# EAGLE board Esp8266_HeatController2ch_Tg1612_v1.0 (EAGLE 9.7.0)
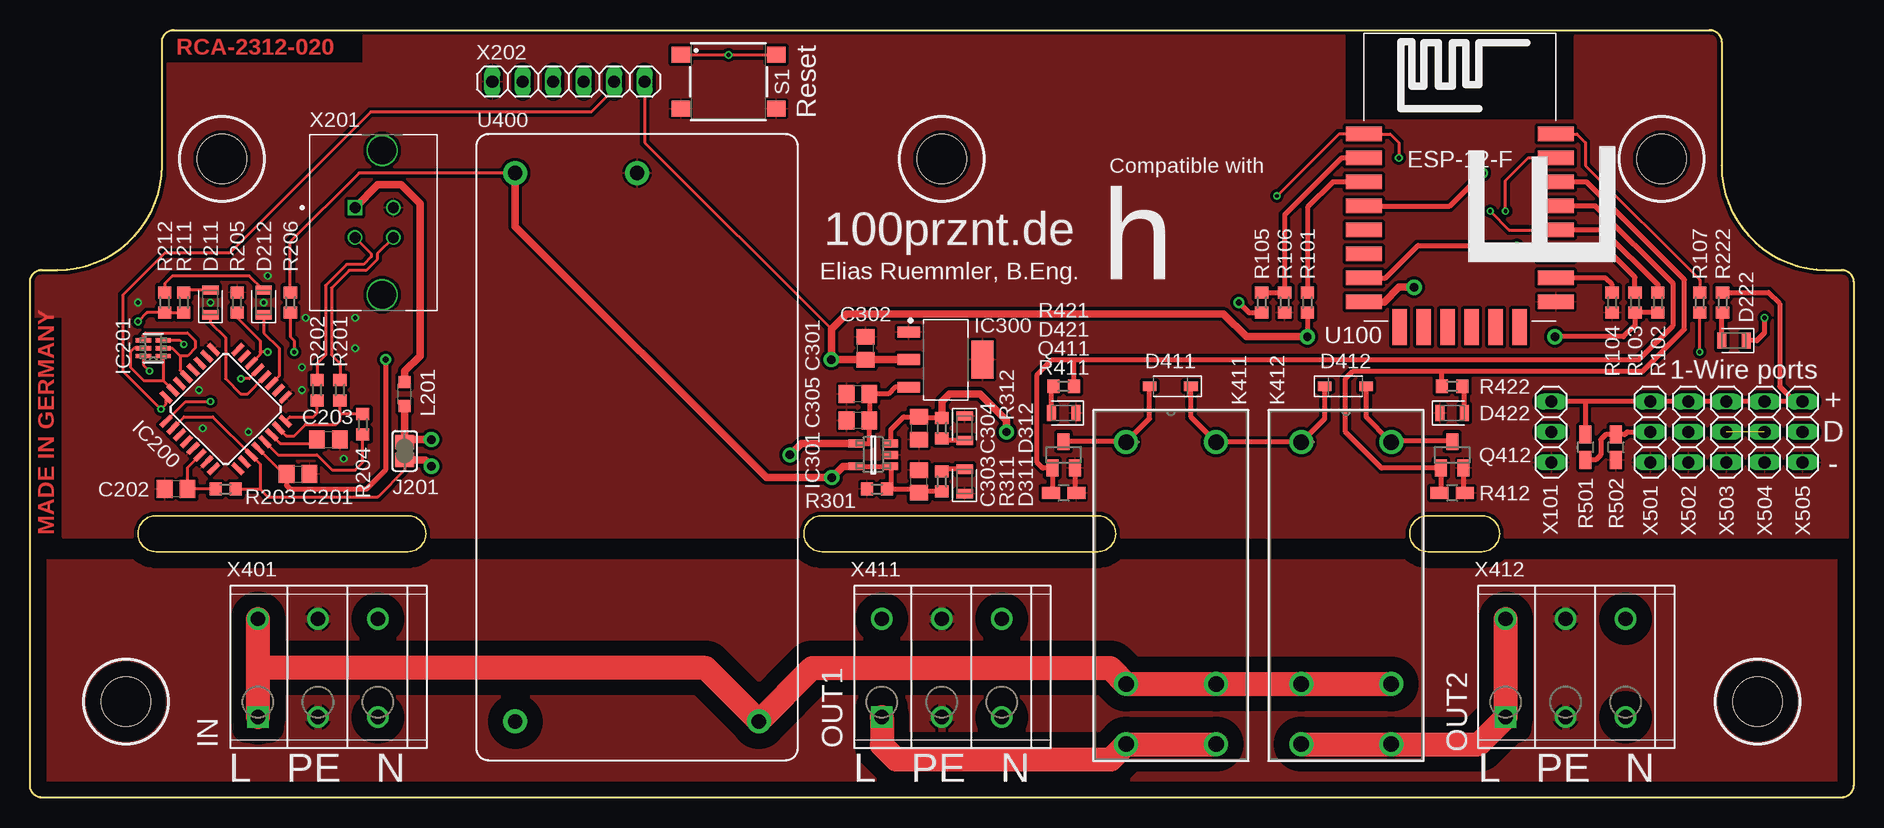
[diagram p0: board, top side]
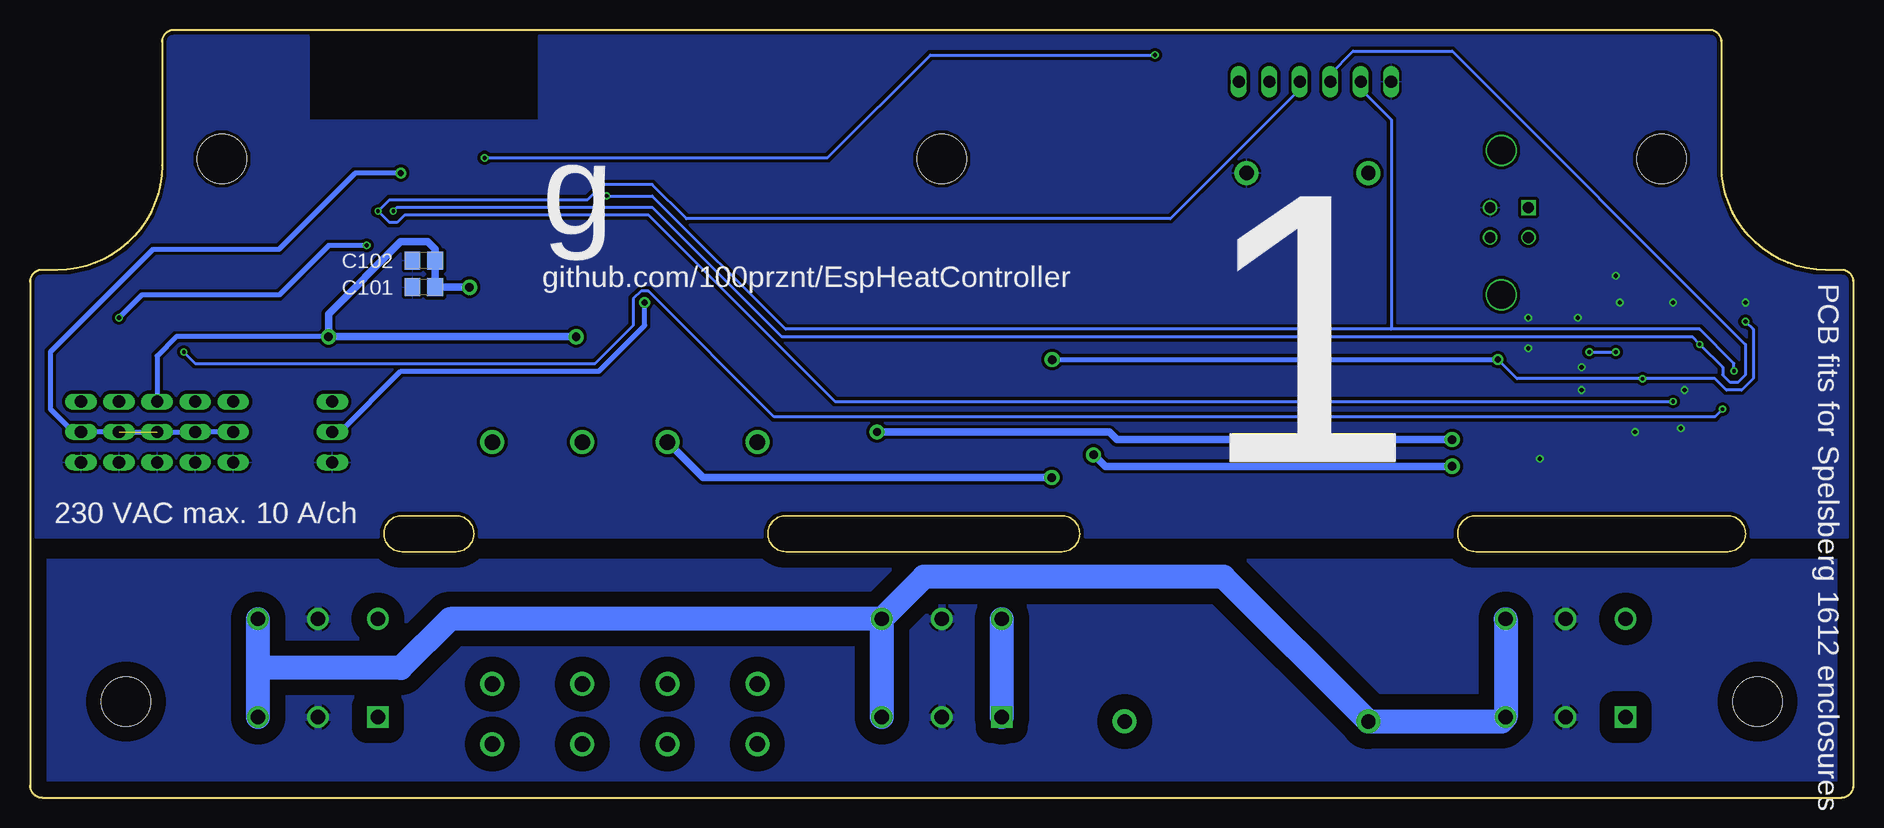
[diagram p1: board, bottom side, seen from below]

Size 152 x 64 mm. Coordinates in mm from the lower left corner, seen from the top.
Outline: 152,43 152,1 arc-90 151,0 1,0 arc-90 0,1 0,43 arc-90 1,44 2.3,44 arc90 11,52.7 11,63 arc-90 12,64 140,64 arc-90 141,63 141,52.7 arc90 149.7,44 151,44 arc-90 152,43
Outline: 66,20.5 89,20.5 arc90 90.5,22 arc90 89,23.5 66,23.5 arc90 64.5,22 arc90 66,20.5
Outline: 116.5,20.5 121,20.5 arc90 122.5,22 arc90 121,23.5 116.5,23.5 arc90 115,22 arc90 116.5,20.5
Outline: 10.5,20.5 31.5,20.5 arc90 33,22 arc90 31.5,23.5 10.5,23.5 arc90 9,22 arc90 10.5,20.5
Copper layers (1*16): Top / Bottom
Stack-up Default Layer Stack: Top User Defined 0.035mm / Dielectric-1 User Defined 1.6mm / Bottom User Defined 0.035mm
Design rules: minimum copper width class=1 10mil, minimum copper width class=0 10mil, minimum copper width 5mil, minimum drill size 0.3mm, copper clearance class=1 to class=1 10mil, copper clearance class=0 to class=0 10mil, copper clearance wire_polygon to wire_polygon 5mil, copper clearance wire_polygon to pad_smd 5mil, copper clearance wire_polygon to via 5mil, copper clearance pad_smd to pad_smd 5mil, copper clearance pad_smd to via 5mil, copper clearance via to via 5mil, copper clearance smd to pad (same net) 5mil, copper clearance smd to via (same net) 5mil, copper clearance smd to smd (same net) 5mil, dimension clearance 0.3mm, restrict clearance 0mil, drill distance 0.2mm, keepout clearance 0mil
Net classes: 0 default: width 0.254 mm, clearance 0.254 mm; 1 usb: width 0.254 mm, clearance 0.254 mm
Holes 4.1 mm at 8,8 144,8 16,53.25 76,53.25 136,53.25
RestrictTop: area 109.7,56.5 to 128.7,64.8; area 0.1,21.6 to 2.7,40; area 11.2,61.3 to 27.7,63.8
RestrictBottom: area 109.7,56.5 to 128.7,64.8

## Footprints (pad centres in the part's own frame; a part is rotated, then mirrored left to right if it is on the bottom)
C0805 = smd 1.3 x 1.5: 1 -0.95,0; 2 0.95,0
LEDC2012X110N_FLAT-B = smd 0.762 x 1.362: A 1.025,0; C -1.025,0
SOD3715X135 = smd 1.127 x 0.784: 1 -1.722,0; 2 1.722,0
LQFP32-7X7 = smd 1.2 x 0.4: 1 -4.225,2.8; 2 -4.225,2; 3 -4.225,1.2; 4 -4.225,0.4; 5 -4.225,-0.4; 6 -4.225,-1.2; 7 -4.225,-2; 8 -4.225,-2.8; 17 4.225,-2.8; 18 4.225,-2; 19 4.225,-1.2; 20 4.225,-0.4; 21 4.225,0.4; 22 4.225,1.2; 23 4.225,2; 24 4.225,2.8 | smd 0.4 x 1.2: 9 -2.8,-4.225; 10 -2,-4.225; 11 -1.2,-4.225; 12 -0.4,-4.225; 13 0.4,-4.225; 14 1.2,-4.225; 15 2,-4.225; 16 2.8,-4.225; 25 2.8,4.225; 26 2,4.225; 27 1.2,4.225; 28 0.4,4.225; 29 -0.4,4.225; 30 -1.2,4.225; 31 -2,4.225; 32 -2.8,4.225
SOT-363_ROM = smd 1.27 x 0.356: 1 -0.826,0.66; 2 -0.826,0; 3 -0.826,-0.66; 4 0.826,-0.66; 5 0.826,0; 6 0.826,0.66
SOT230P700X170-4 = smd 1.86 x 0.898: 1 -3.075,2.3; 2 -3.075,0; 3 -3.075,-2.3 | smd 1.86 x 3.189: 4 3.075,0
DBV0005A_M = smd 1.2 x 0.65: 1 -1.475,0.95; 2 -1.475,0; 3 -1.475,-0.95; 4 1.475,-0.95; 5 1.475,0.95
SJ = smd 1.168 x 1.6: 1 -0.762,0; 2 0.762,0
RELAY-SPST2_5MM = drill 1.295 pad 2.007: 1 -3.683,20.117; 2 -3.683,-0.051; 3 -3.683,-5.08; 4 3.81,-5.08; 5 3.81,-0.051; 6 3.81,20.117
L2012C = smd 1 x 1: 1 -1,0; 2 1,0
SOT23 = smd 1 x 1.4: 1 -0.95,-1.1; 2 0.95,-1.1; 3 0,1.1
R0603 = smd 1 x 1.1: 1 -0.85,0; 2 0.85,0
R0805W = smd 1.5 x 1: 1 -1.052,0; 2 1.052,0
430152050826 = smd 1.55 x 1.3: 1 -3.975,2.25; 2 -3.975,-2.25; 3 3.975,2.25; 4 3.975,-2.25
ESP12F-SMD = smd 3 x 1.2: ADC -8,3.8; EN -8,1.8; GND 8,-8.2; GPIO0 8,-2.2; GPIO2 8,-4.2; GPIO4 8,-0.2; GPIO5 8,1.8; GPIO12 -8,-4.2; GPIO13 -8,-6.2; GPIO14 -8,-2.2; GPIO15 8,-6.2; GPIO16 -8,-0.2; RST -8,5.8; RXD0 8,3.8; TXD0 8,5.8; VCC -8,-8.2 | smd 1.2 x 3: CS0 -5,-10.3; GPIO9 -1,-10.3; GPIO10 1,-10.3; MISO -3,-10.3; MOSI 3,-10.3; SCLK 5,-10.3
TMF10 = drill 1.2 pad 2: 1 -22.86,10.16; 2 -22.86,-10.16; 3 22.86,10.16; 4 22.86,0
1X03 = drill 1.016 long: 1 -2.54,0; 2 0,0; 3 2.54,0
M701-330442 = drill 0.914 square: 1 1.245,1.6 | drill 0.914: 2 -1.245,1.6; 3 -1.245,-1.6; 4 1.245,-1.6 | drill 2.311: SH1 -6.02,-0.66; SH2 6.02,-0.66
1X06 = drill 1.016 long: 1 -6.35,0; 2 -3.81,0; 3 -1.27,0; 4 1.27,0; 5 3.81,0; 6 6.35,0
SPT2,5/3-V-5,0 = drill 1.2 pad 1.8 square: 1A -5,-4.1 | drill 1.2 pad 1.8: 1B -5,4.1; 2A 0,-4.1; 2B 0,4.1; 3A 5,-4.1; 3B 5,4.1

## Placement (x,y rotation side)
C101  [C0805]  119.18,42.55 180 bottom
C102  [C0805]  119.18,44.77 180 bottom
C201  100n  [C0805]  22.34,26.99 0 top
C202  100n  [C0805]  12.18,25.72 180 top
C203  33n  [C0805]  24.88,29.84 0 top
C301  100n  [C0805]  69.02,33.66 180 top
C302  10u  [C0805]  69.65,37.47 90 top
C303  0u22  [C0805]  74.09,26.35 90 top
C304  0u22  [C0805]  74.09,30.8 270 top
C305  1u  [C0805]  69.02,31.43 180 top
D211  LED_BLUE  [LEDC2012X110N_FLAT-B]  15.04,41.27 90 top
D212  LED_BLUE  [LEDC2012X110N_FLAT-B]  19.48,41.27 90 top
D222  LED_BLUE  [LEDC2012X110N_FLAT-B]  142.04,38.1 180 top
D311  LED_BLUE  [LEDC2012X110N_FLAT-B]  77.91,26.35 90 top
D312  LED_BLUE  [LEDC2012X110N_FLAT-B]  77.91,30.8 270 top
D411  1N4148W  [SOD3715X135]  95.05,34.29 180 top
D412  1N4148W  [SOD3715X135]  109.66,34.29 0 top
D421  LED_BLUE  [LEDC2012X110N_FLAT-B]  86.16,32.07 180 top
D422  LED_BLUE  [LEDC2012X110N_FLAT-B]  118.55,32.07 0 top
IC200  FT232BL  [LQFP32-7X7]  16.31,32.38 135 top
IC201  UMH3N  [SOT-363_ROM]  10.28,37.47 180 top
IC300  LD1117S33TR  [SOT230P700X170-4]  76.32,36.51 0 top
IC301  TPS2104DBVRDBV0005A_M  [DBV0005A_M]  70.28,28.57 180 top
J201  [SJ]  31.23,28.89 270 top
K411  RZ03-1A4-D005  [RELAY-SPST2_5MM]  95.05,9.53 0 top
K412  RZ03-1A4-D005  [RELAY-SPST2_5MM]  109.66,9.53 0 top
L201  MI0805K400R-10  [L2012C]  31.23,33.66 90 top
Q411  BSS138  [SOT23]  86.16,28.57 0 top
Q412  BSS138  [SOT23]  118.55,28.57 0 top
R101  12k  [R0603]  106.48,41.27 270 top
R102  12k  [R0603]  135.69,41.27 270 top
R103  12k  [R0603]  133.78,41.27 270 top
R104  12k  [R0603]  131.88,41.27 270 top
R105  n/a  [R0603]  102.67,41.27 90 top
R106  n/a  [R0603]  104.58,41.27 90 top
R107  470  [R0603]  139.18,41.27 90 top
R201  27R  [R0603]  25.84,33.97 270 top
R202  27R  [R0603]  23.93,33.97 270 top
R203  470  [R0603]  16.31,25.72 0 top
R204  1K5  [R0603]  27.74,31.11 270 top
R205  10K  [R0603]  17.26,41.27 270 top
R206  1K5  [R0603]  21.71,41.27 270 top
R211  220  [R0603]  12.82,41.27 270 top
R212  220  [R0603]  11.23,41.27 270 top
R222  220  [R0603]  141.09,41.27 90 top
R301  10k  [R0603]  70.6,25.72 0 top
R311  500R  [R0603]  76,26.35 270 top
R312  500R  [R0603]  76,30.8 90 top
R411  47K  [R0805W]  86.16,25.4 180 top
R412  47K  [R0805W]  118.55,25.4 180 top
R421  220  [R0603]  86.16,34.29 0 top
R422  220  [R0603]  118.55,34.29 180 top
R501  4K7  [R0805W]  129.66,29.21 90 top
R502  n/a  [R0805W]  132.2,29.21 90 top
S1  430152050826  [430152050826]  58.22,59.69 0 top
U100  ESP8266MOD  [ESP12F-SMD]  119.18,49.53 0 top
U400  TMF 10105  [TMF10]  50.6,29.21 90 top
X101  [1X03]  126.8,30.48 90 top
X201  M701-330442  [M701-330442]  28.69,47.94 90 top
X202  [1X06]  44.89,59.69 0 top
X401  SPT2,5/3-V-5,0  [SPT2,5/3-V-5,0]  24,10.79 0 top
X411  SPT2,5/3-V-5,0  [SPT2,5/3-V-5,0]  76,10.79 0 top
X412  SPT2,5/3-V-5,0  [SPT2,5/3-V-5,0]  128,10.79 0 top
X501  [1X03]  135.06,30.48 90 top
X502  [1X03]  138.23,30.48 90 top
X503  [1X03]  141.41,30.48 90 top
X504  [1X03]  144.58,30.48 90 top
X505  [1X03]  147.75,30.48 90 top

## Library data of the parts
C101 C102 C201-C203 C301-C305 = rcl; SPICEPREFIX: C
D211 D212 D222 D311 D312 D421 D422 = LED; CATEGORY: LED; COLOR: BLUE; DESCRIPTION: CHIP LED FLAT; SUB-CATEGORY: CHIP; TYPE: FLAT_TOP
D411 D412 = Diode; CATEGORY: Diode; DESCRIPTION: DIODE GEN PURP 100V 300MA SOD123; MANUFACTURER: Diodes Incorporated; SUB-CATEGORY: Rectifier
IC200 = FutureTechnologyDevicesInternational; MF: FARNELL; MPN: FT232BL/TR; OC_FARNELL: unknown; OC_NEWARK: 38K1551
IC201 = RohmSemiconductor; COPYRIGHT: Copyright (C) 2023 Ultra Librarian. All rights reserved.; MANUFACTURER_PART_NUMBER: UMH3NTN; MFR_NAME: ROHM Semiconductor
IC300 = IC_Power-Management; CATEGORY: IC_Linear; DESCRIPTION: Adjustable voltage regulator; MANUFACTURER: STMicroelectronics; MPN: Generic; SERIES: LM1117; SUB-CATEGORY: Voltage Regulator; TYPE: Linear
IC301 = TexasInstruments; COPYRIGHT: Copyright (C) 2023 Ultra Librarian. All rights reserved.; MANUFACTURER_PART_NUMBER: TPS2104DBVR; MFR_NAME: Texas Instruments; REFDES: RefDes; TYPE: TYPE
J201 = jumper
K411 K412 = Relays; BUILT_BY: EMA_UL_Team; CATEGORY: Power Relays; COPYRIGHT: Copyright (C) 2016 Accelerated Designs. All rights reserved; DESCRIPTION: RZ03-1A4-D012; MANUFACTURER_PART_NUMBER: 1-1415899-6; PART_STATUS: active; SERIES: SCHRACK Power PCB Relay RZ; VENDOR: TE Connectivity
L201 = rcl; SPICEPREFIX: L
Q411 Q412 = Transistor; CATEGORY: Transistor; SUB-CATEGORY: MOSFET; TYPE: N-Channel
R101-R107 R201-R206 R211 R212 R222 R301 R311 R312 R411 R412 R421 R422 R501 R502 = rcl; SPICEPREFIX: R
S1 = Wurth_Switch_WS-TASV; DATASHEET-URL: https://www.we-online.com/redexpert/spec/430152050826?ae; HEIGHT: 5mm; OPERATION-FORCE: 260g; PART-NUMBER: 430152050826; QTY: 1000
U100 = EspressifSystems
U400 = TracoPower
X101 X202 X501-X505 = pinhead
X201 = Connector_USB; CATEGORY: Connector; CONTACTS: 4; CURRENT_RATING: 1.5A; DESCRIPTION: CONN RCPT USB2.0 TYPEB 4POS VERT; GENDER: Receptacle; MANUFACTURER: Harwin; MOUNT_TYPE: Vertical; MPN: M701-330442; OPERATING_TEMP: -55°C to +85°C; PART_STATUS: Active; ROHS_COMPLIANT: RoHS Compliant; SERIES: -; SUB-CATEGORY: USB; TYPE: USB-B; VOLTAGE_RATING: 30VAC/DC
X401 X411 X412 = PhoenixContact; ARROW_PART_NUMBER: 1991105; ARROW_PRICE-STOCK: https://www.arrow.com/en/products/1991105/phoenix-contact?region=nac; DESCRIPTION: PCB terminal block, nominal current: 24 A, rated voltage (III/2): 400 V, nominal cross section: 2.5 mm?, Number of potentials: 3, Number of rows: 1, Number of positions per row: 3, product range: SPT 2,5/..-V, pitch: 5 mm, connection method: Push-in spring connection, mounting: Wave soldering, conductor/PCB connection direction: 90 ?, color: green, Pin layout: Linear double pinning, Solder pin [P]: 2.5 mm, type of packaging: packed in cardboard; HEIGHT: 14.4mm; MANUFACTURER_NAME: Phoenix Contact; MANUFACTURER_PART_NUMBER: 1991105; MOUSER_PART_NUMBER: 651-1991105; MOUSER_PRICE-STOCK: https://www.mouser.co.uk/ProductDetail/Phoenix-Contact/1991105?qs=HG6crFoccqodg51MDMYEiw%3D%3D

## Nets
+3V3: C101.1 C102.1 C201.1 C302.1 IC200.4 IC200.13 IC300.2 R101.2 R102.2 R103.2 R211.2 R212.2 R222.2 R501.2 U100.VCC X101.3 X202.6 X501.3 X502.3 X503.3 X504.3 X505.3
A0: R105.1 X101.2
AC_L: K411.2 K411.5 K412.2 K412.5 U400.2 X401.1A X401.1B
AC_N: U400.1 X401.3A X401.3B X411.3A X411.3B X412.3A X412.3B
AC_PE: X401.2A X401.2B X411.2A X411.2B X412.2A X412.2B
CH1: Q411.1 R411.2 R421.2 U100.GPIO4
CH2: Q412.1 R412.2 R422.2 U100.GPIO5
D_N [usb]: IC200.8 R202.2
D_P [usb]: IC200.7 R201.2 R204.1
DTR: IC200.21 IC201.2 IC201.4
EXTPWR: C303.1 D411.1 D412.1 IC301.1 IC301.5 K411.6 K412.1 R206.1 R301.2 R311.2 U400.3
GND: C101.2 C102.2 C201.2 C202.2 C203.2 C301.2 C302.2 C303.2 C304.2 C305.2 D311.C D312.C D421.C D422.C IC200.9 IC200.17 IC200.29 IC200.31 IC300.1 IC300.4 IC301.2 Q411.2 Q412.2 R104.2 R106.1 R205.1 R301.1 R411.1 R412.1 R502.1 S1.2 S1.4 U100.GND U400.4 X101.1 X201.4 X202.1 X501.1 X502.1 X503.1 X504.1 X505.1
IO0: IC201.3 R102.1 U100.GPIO0 X202.3
IO2: R103.1 U100.GPIO2
IO15: R104.1 U100.GPIO15
N$1: R105.2 R106.2 U100.ADC
N$2: R107.2 U100.TXD0
N$3: R101.1 U100.EN
N$4: D211.C IC200.12
N$5: C202.1 IC200.30 R203.1
N$6: D212.C IC200.11
N$7: D211.A R211.1
N$8: D212.A R212.1
N$9: C203.1 IC200.6
N$10: D312.A R312.1
N$11: D422.A R422.1
N$12: D412.2 K412.6 Q412.3
N$13: L201.2 X201.1
N$14: D411.2 K411.1 Q411.3
N$15: D311.A R311.1
N$16: D421.A R421.1
N$17: IC200.5 R204.2
N$18: IC200.14 R205.2 R206.2
N$19: D222.C U100.GPIO13
N$20: D222.A R222.1
N$23: K411.3 K411.4 X411.1A X411.1B
N$24: K412.3 K412.4 X412.1A X412.1B
OWD: R501.1 R502.2 U100.GPIO16 X501.2 X502.2 X503.2 X504.2 X505.2
RST: IC201.6 S1.1 S1.3 U100.RST X202.2
RTS: IC200.23 IC201.1 IC201.5
RX: IC200.25 U100.RXD0 X202.4
TX: IC200.24 R107.1 X202.5
USBD_N [usb]: R202.1 X201.2
USBD_P [usb]: R201.1 X201.3
USBPWR: C304.1 IC301.3 J201.1 L201.1 R312.2
VIN: C301.1 C305.1 IC200.3 IC200.26 IC300.3 IC301.4 J201.2 R203.2

## Tracks (layer width: path | path; a pad name or v marks a point on that pad's centre or on a via)
+3V3  (via drill 0.3, 0.35, 0.5, 0.7)
  Top 0.254: 13.03,40.64 R211.2 R212.2 9.75,40.42 v9.01,39.69 | IC200.13 18.28,34.92 v17.58,34.92 | X202.6 51.23,54.61 66.79,39.05 | IC200.4 21.14,26.99 C201.1
  Top 0.406: C302.1 | R101.2 v106.48,38.42 | R102.2 R103.2 133.78,39.37 132.83,38.42 v127.12,38.42 | C201.1 21.39,26.03 21.71,25.72 28.06,25.72 29.65,27.3 v29.65,36.51 | X505.3 147.12,33.02 | 147.12,33.02 X504.3 X503.3 X502.3 X501.3 129.66,33.02 | 129.66,33.02 R501.2 | 129.66,33.02 X101.3 | R222.2 144.9,42.12 145.85,41.17 145.85,34.29 147.12,33.02
  Top 0.61: IC300.2 C302.1 | C302.1 v66.8,36.52 v66.79,36.51 66.79,39.05 68.06,40.32 99.5,40.32 101.4,38.42 v106.48,38.42 | U100.VCC 112.88,41.33 114.1,42.55 v115.37,42.55
  Bottom 0.254: v29.65,36.51 28.06,34.92 v17.58,34.92 11.55,34.92 10.59,33.97 9.33,33.97 8.37,34.92 8.37,39.05 v9.01,39.69
  Bottom 0.406: v66.79,36.51 v29.65,36.51 | v127.12,38.42 139.82,38.42 141.41,36.83 X503.3
  Bottom 0.61: v115.37,42.55 C101.1 C102.1 118.23,45.72 118.86,46.35 121.09,46.35 127.12,40.32 v127.12,38.42 v106.48,38.42
A0  (via drill 0.5)
  Top 0.406: v100.77,41.27 101.61,40.42 R105.1
  Bottom 0.406: X101.2 126.16,30.48 121.09,35.56 104.58,35.56 100.77,39.37 v100.77,41.27
AC_L
  Top 2: 19,10.79 56.31,10.79 U400.2 65.2,10.79 90.05,10.79 K411.2 K411.5 K412.2 K412.5 | X401.1A 19,10.79 | 19,10.79 X401.1B
AC_N
  Bottom 2: X401.3B X401.3A 29.34,6.35 U400.1 52.5,18.41 77.48,18.41 X411.3B | X411.3A X411.3B | X411.3B 116.98,14.89 121.09,10.79 133,10.79 | 133,10.79 X412.3B | X412.3A 133,10.79
AC_PE
  pour Top (isolate 1.27): -1.47,19.68 153.47,19.68 153.47,-1.91 -1.47,-1.91
  pour Bottom (isolate 1.27): -5.92,19.68 154.74,19.68 154.74,-4.45 -5.92,-4.45
CH1
  Top 0.406: R411.2 85.21,25.5 Q411.1 84.4,27.48 83.94,27.94 83.94,35.24 85.21,36.51 87.01,36.51 | 87.01,36.51 134.1,36.51 136.96,39.37 136.96,42.86 130.49,49.33 U100.GPIO4 | R421.2 87.01,36.51
CH2
  Top 0.406: R412.2 117.59,25.5 Q412.1 112.66,27.48 109.66,30.48 109.66,34.92 110.29,35.56 117.69,35.56 | 117.69,35.56 134.42,35.56 137.91,39.05 137.91,43.18 129.76,51.33 U100.GPIO5 | R422.2 117.69,35.56
D_N
  Top 0.254: IC200.8 21.65,31.75 23.61,31.75 23.93,32.07 R202.2
D_P
  Top 0.254: IC200.7 21.36,30.16 22.02,30.16 22.98,31.11 25.52,31.11 25.84,31.43 25.84,31.96 | 25.84,31.96 R201.2 | R204.1 25.84,31.96
DTR
  Top 0.254: IC201.2 11.86,37.47 12.5,36.83 | 12.5,36.83 12.5,35.63 IC200.21 | IC201.4 9.45,38.54 9.64,38.73 13.13,38.73 13.77,38.1 13.77,37.47 13.13,36.83 12.5,36.83
EXTPWR  (via drill 0.7)
  Top 0.254: R206.1 21.71,46.35 27.42,52.07 U400.3
  Top 0.406: R311.2 74.19,25.5 C303.1 73.78,25.72 71.76,25.72 | R301.2 71.76,25.72 | 71.76,25.72 IC301.1 IC301.5 | D411.1 96.77,31.73 K411.6 K412.1 107.93,31.6 D412.1
  Top 0.61: U400.3 40.44,47.62 61.39,26.67 v66.84,26.67 67.79,27.62 IC301.5
  Bottom 0.61: K411.6 95.89,26.67 v66.84,26.67
GND  (via drill 0.35)
  Top 0.406: Q411.2 87.11,25.5 R411.1 | Q412.2 119.5,25.5 R412.1
  other vias: 14.09,33.97 18.22,30.48 14.41,30.8 9.01,41.27 19.8,43.5 22.66,35.88 22.66,33.97 27.1,37.47 27.1,40.01 22.98,40.01 19.48,41.27 15.04,41.27 26.15,28.26
  pour Top: -2.11,21.59 153.47,21.59 153.47,71.12 -2.11,71.12
  pour Bottom: -6.55,21.59 155.38,21.59 155.38,70.48 -6.55,70.48
IO0  (via drill 0.3)
  Top 0.254: IC201.3 12.48,38.12 v12.82,37.78 | v121.72,48.9 123.28,47.33 128.07,47.33
  Top 0.406: U100.GPIO0 128.07,47.33 131.12,47.33 135.69,42.76 R102.1
  Bottom 0.254: v121.72,48.9 121.4,49.21 100.13,49.21 89.34,38.42 13.45,38.42 v12.82,37.78 10.91,35.88 10.91,35.24 10.28,34.61 9.64,34.61 9.01,35.24 9.01,37.78 33.45,62.23 41.71,62.23 43.62,60.33 X202.3
IO2
  Top 0.406: U100.GPIO2 131.85,45.33 133.78,43.4 R103.1
IO15
  Top 0.406: U100.GPIO15 131.31,43.33 131.88,42.76 R104.1
N$1
  Top 0.406: U100.ADC 109.33,53.33 104.58,48.58 R106.2 R105.2
N$2
  Top 0.254: U100.TXD0 128.94,55.33 129.66,54.61 129.66,52.7 139.18,43.18 R107.2
N$3
  Top 0.406: U100.EN 108.6,51.33 106.48,49.21 R101.1
N$4
  Top 0.254: D211.C 15.04,39.62 16.31,38.34 16.31,34.92 17.58,33.66 18.15,33.66 IC200.12
N$5
  Top 0.254: IC200.30 13.13,27.51 C202.1 R203.1
N$6
  Top 0.254: D212.C 19.48,38.73 20.76,37.47 20.76,35.13 IC200.11
N$7
  Top 0.254: D211.A 12.99,42.3 R211.1
N$8
  Top 0.254: D212.A 18.29,43.5 11.86,43.5 11.23,42.86 R212.1
N$9
  Top 0.254: IC200.6 20.87,29.53 23.93,29.53 C203.1
N$10
  Top 0.406: D312.A 76,29.77 R312.1
N$11
  Top 0.406: D422.A 119.57,34.29 R422.1
N$12
  Top 0.406: K412.6 113.36,29.74 | 113.36,29.74 111.38,31.73 D412.2 | Q412.3 118.48,29.74 113.36,29.74
N$13
  Top 0.61: X201.1 29,51.09 30.94,51.09 32.5,49.53 32.5,36.83 31.23,35.56 L201.2
N$14
  Top 0.406: K411.1 91.41,29.68 | 91.41,29.68 93.33,31.6 D411.2 | 91.41,29.68 Q411.3
N$15
  Top 0.406: D311.A 76,27.38 R311.1
N$16
  Top 0.406: D421.A 85.14,34.29 R421.1
N$17
  Top 0.254: IC200.5 20.69,28.57 23.93,28.57 25.2,27.3 27.1,27.3 27.74,27.94 R204.2
N$18  (via drill 0.35)
  Top 0.254: R205.2 17.26,40.01 19.17,38.1 19.17,37.15 | 19.17,37.15 19.17,36.94 IC200.14 | R206.2 21.71,38.42 22.02,38.1 v22.02,37.15 | v19.8,37.15 19.17,37.15
  Bottom 0.254: v22.02,37.15 v19.8,37.15
N$19  (via drill 0.35)
  Top 0.406: U100.GPIO13 112.98,43.33 115.69,46.04 v123.94,46.04 | v144.58,40.01 144.58,38.73 143.94,38.1 D222.C
  Bottom 0.406: v123.94,46.04 127.12,46.04 131.25,41.91 142.68,41.91 v144.58,40.01
N$20
  Top 0.406: D222.A 141.01,40.35 R222.1
N$23
  Top 2: X411.1A 71,4.37 72.19,3.17 90.1,3.17 K411.3 K411.4
  Bottom 2: X411.1A X411.1B
N$24
  Top 2: K412.3 K412.4 120.75,4.45 X412.1A X412.1B
OWD  (via drill 0.5)  (1 unrouted)
  Top 0.406: U100.GPIO16 118.34,49.33 v121.09,52.07 | X501.2 133.15,30.48 132.93,30.26 R502.2 131.34,30.26 130.93,29.84 130.93,28.57 130.51,28.16 R501.1
  Bottom 0.406: v121.09,52.07 124.9,52.07 131.25,45.72 141.72,45.72 150.3,37.15 150.3,32.38 148.39,30.48 X505.2 X504.2 X502.2 X501.2
RST  (via drill 0.3, 0.35)
  Top 0.254: IC201.6 9.45,36.07 v9.96,35.56 | v103.94,50.16 109.1,55.33 U100.RST 113.38,55.33 114.1,54.61 v114.1,53.34 | S1.1 54.27,61.91 v58.22,61.91 62.17,61.91 S1.3
  Bottom 0.254: v9.96,35.56 9.96,36.2 12.82,39.05 38.53,39.05 | 38.53,39.05 89.02,39.05 100.13,50.16 v103.94,50.16 | X202.2 41.08,59.05 38.53,56.52 38.53,39.05 | v114.1,53.34 85.53,53.34 76.95,61.91 v58.22,61.91
RTS
  Top 0.254: IC201.1 11.1,34.76 | 11.1,34.76 IC200.23 | IC201.5 8.69,37.47 8.37,37.15 8.37,35.88 9.49,34.76 11.1,34.76
RX  (via drill 0.3)
  Top 0.254: IC200.25 12.98,33.02 v15.04,33.02 | v122.99,48.9 122.99,51.44 124.9,53.34 U100.RXD0
  Bottom 0.254: v15.04,33.02 84.89,33.02 100.45,48.58 120.77,48.58 121.4,47.94 122.04,47.94 v122.99,48.9 122.04,49.85 105.53,49.85 104.26,51.12 100.13,51.12 97.27,48.26 56.95,48.26 46.16,59.05 X202.4
TX  (via drill 0.3)
  Top 0.254: v139.18,37.15 R107.1 | X202.5 48.7,59.05 46.79,57.15 28.38,57.15 16.63,45.4 11.23,45.4 7.74,41.91 7.74,35.56 v10.91,32.38 11.34,32.81 IC200.24
  Bottom 0.254: v10.91,32.38 11.55,31.75 89.97,31.75 100.45,42.23 101.08,42.23 101.72,41.59 101.72,39.37 104.89,36.2 138.23,36.2 v139.18,37.15
USBD_N
  Top 0.254: R202.1 23.93,36.2 24.63,36.9 24.63,42.69 26.39,44.45 27.8,44.45 28.44,45.09 28.44,45.35 X201.2
USBD_P
  Top 0.254: R201.1 25.84,36.2 25.14,36.9 25.14,42.48 26.6,43.94 28.01,43.94 28.95,44.88 28.95,45.35 X201.3
USBPWR  (via drill 0.7)
  Top 0.406: IC301.3 71.76,30.68 72.82,31.75 C304.1 74.19,31.65 R312.2
  Top 0.61: L201.1 J201.1 31.42,29.84 v33.45,29.84 | R312.2 76,33.02 76.64,33.66 79.17,33.66 81.4,31.43 v81.4,30.48
  Bottom 0.61: v81.4,30.48 62.03,30.48 61.39,29.84 v33.45,29.84
VIN  (via drill 0.7)
  Top 0.254: J201.2 31.23,27.3 29.01,25.08 19.8,25.08 19.17,25.72 | 19.17,25.72 19.17,27.83 IC200.3 15.25,31.75 12.85,31.75 IC200.26 | R203.2 19.17,25.72
  Top 0.406: IC300.3 72.11,34.21 71.56,33.66 C301.1 C305.1 69.97,29.52 IC301.4
  Top 0.61: IC301.4 64.3,29.52 v63.35,28.57 | v33.45,27.62 32.95,28.13 J201.2
  Bottom 0.61: v63.35,28.57 63.3,28.57 62.35,27.62 v33.45,27.62

## Text on the board
Top: RCA-2312-020 | MADE IN GERMANY
SilkscreenTop: Reset | Compatible with | 100prznt.de | Elias Ruemmler, B.Eng. | 1-Wire ports | + / D / - | IN | OUT1 | OUT2 | L PE N | L PE N | L PE N
SilkscreenBottom: PCB fits for Spelsberg 1612 enclosures | github.com/100prznt/EspHeatController | 230 VAC max. 10 A/ch
NamesTop: h | E
NamesBottom: g | 1
SolderMaskTop: EspHeatController | 230 VAC 2ch | v1.0